# Altium PCB Flame68.pcbdoc (part 1 of 2)
Units mil, origin at the board's own origin, x right, y up, seen from the top; angles counter-clockwise.
Board outline 13330 x 5150 mil, 2 copper layers (Top Layer, Bottom Layer); 224 components, 167 nets, 1114 pads, 151 vias.
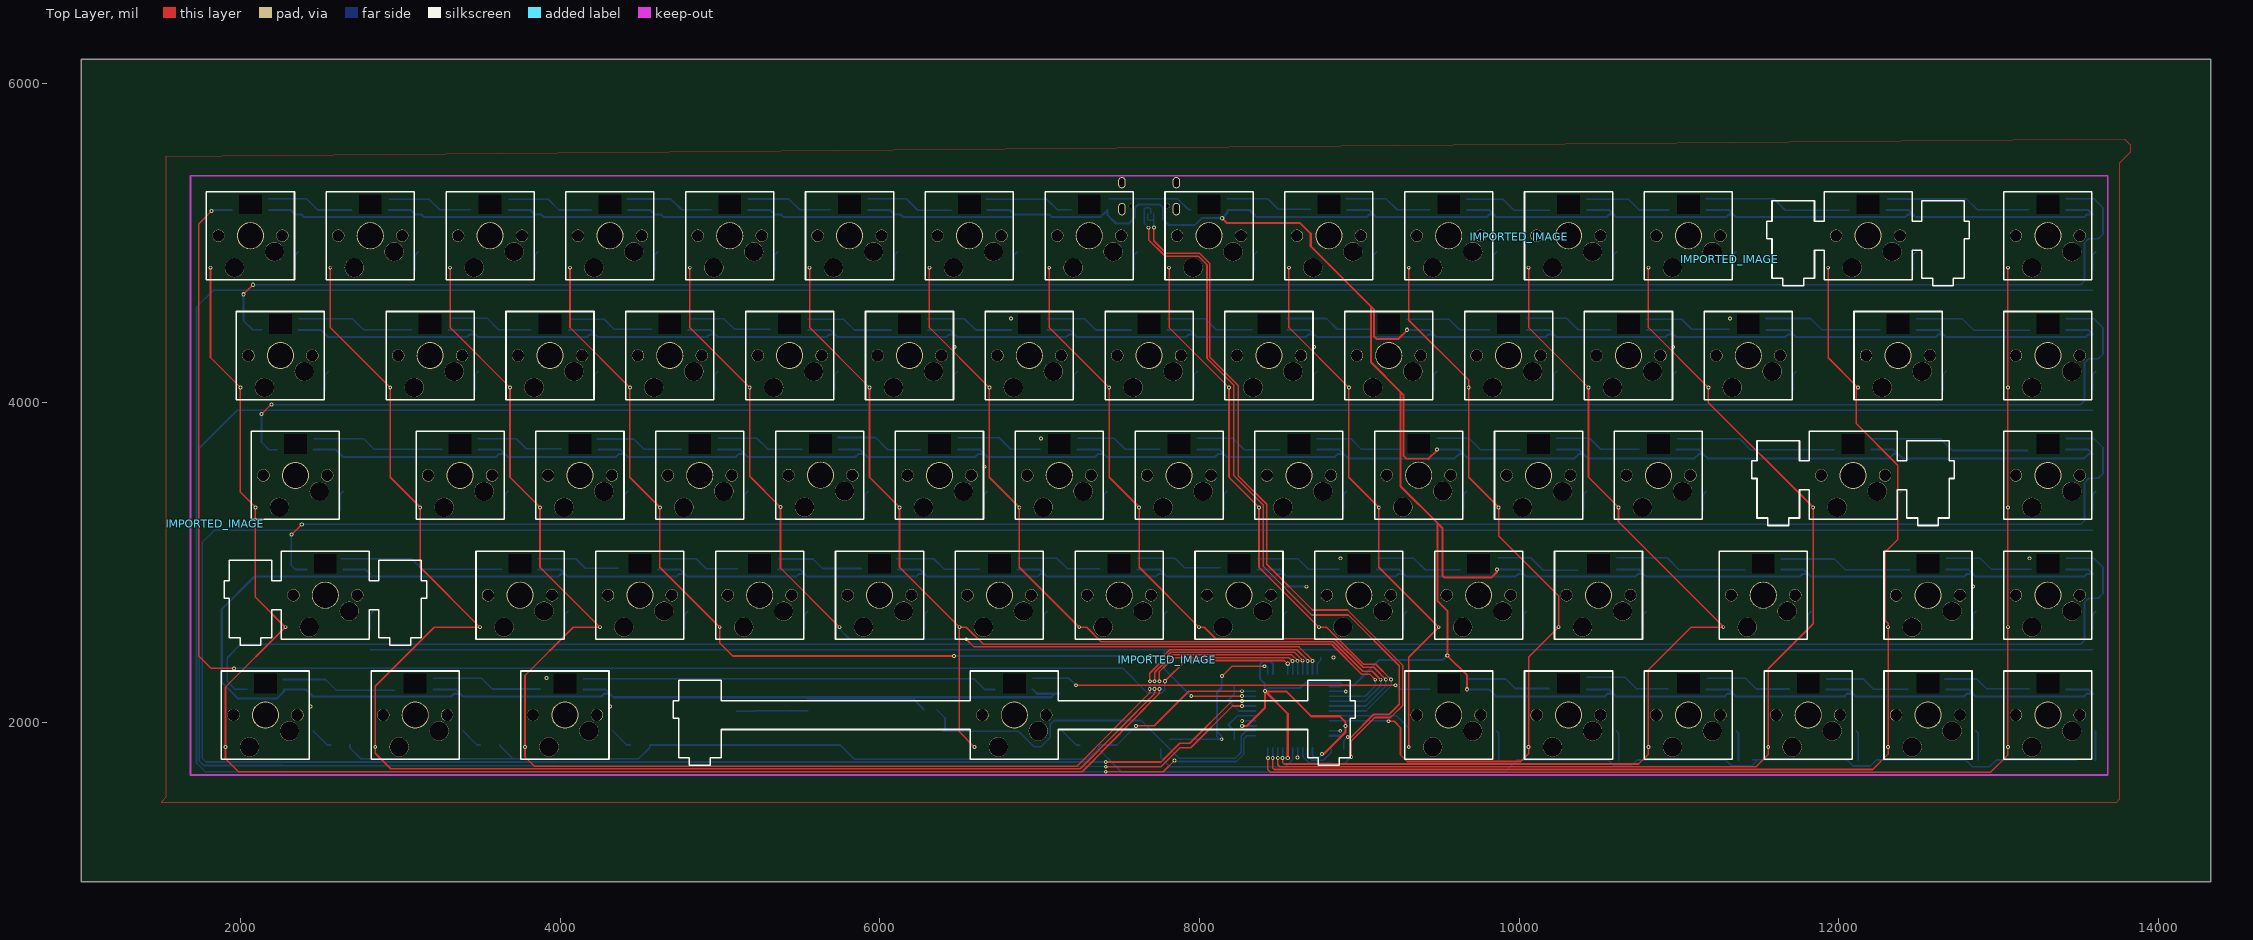
[diagram p0: Top Layer view]
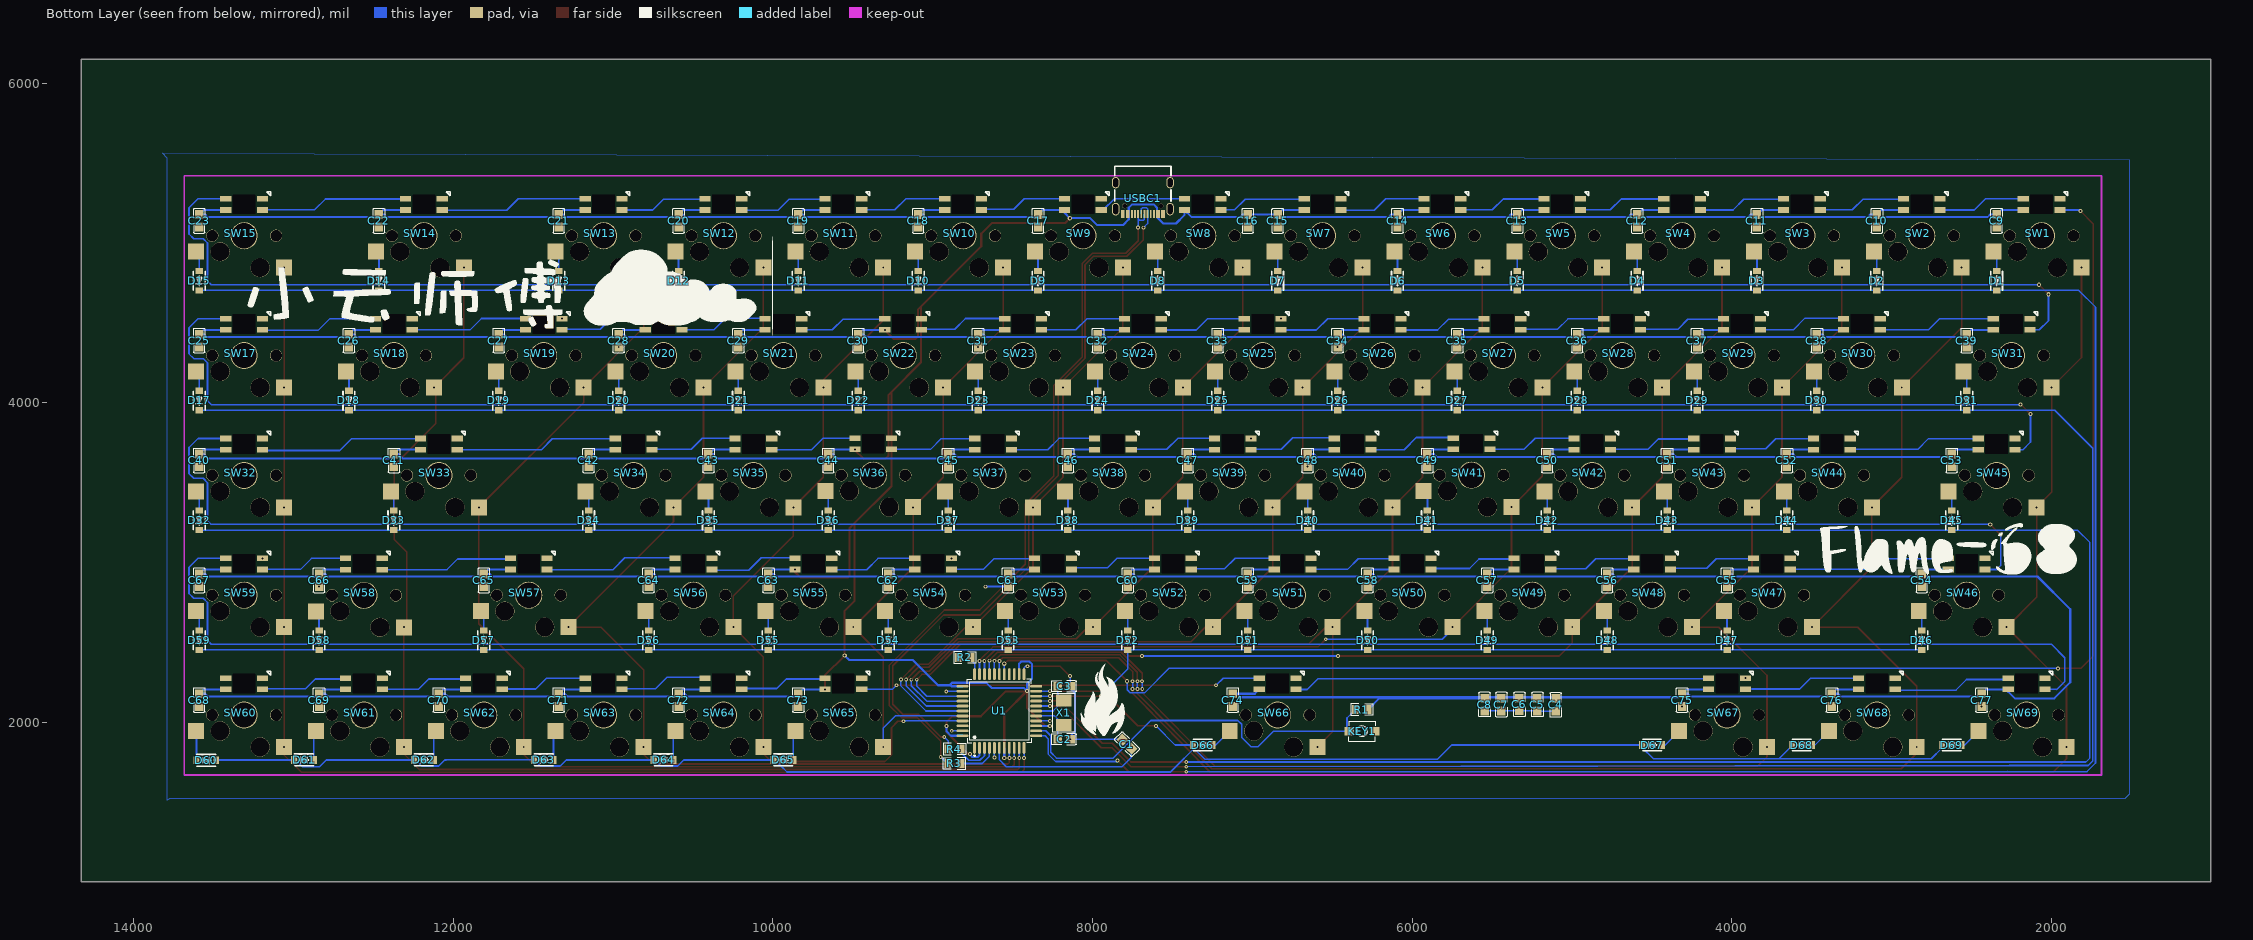
[diagram p1: Bottom Layer view, seen from below]

## Layer stack, top to bottom
Top Layer: signal copper (thickness not stored)
Dielectric: dielectric 12.6, FR-4, Dk 4.8
Bottom Layer: signal copper (thickness not stored)

## Board outline
14330,1000 1000,1000 1000,6150 14330,6150

## Components (designator, comment, footprint, x,y, rotation, side; value= is the part's Value field where it differs from the comment)
C1 "1uF" C0805 7784,1862 r45 bottom
C2 "20pF" C0805 8178,1893 r0 bottom
C3 "20pF" C0805 8178,2225 r0 bottom
C4 "100nF" C0805 5100.6,2108.2 r270 bottom
C5 "100nF" C0805 5215.2,2109.76 r270 bottom
C6 "100nF" C0805 5327.83,2110.83 r270 bottom
C7 "100nF" C0805 5440.19,2109.6 r270 bottom
C8 "470nF" C0805 5546,2110 r270 bottom
C9 "100nF" C0805 2340.77,5138.47 r90 bottom
C10 "100nF" C0805 3090.78,5138.47 r90 bottom
C11 "100nF" C0805 3840.8,5138.47 r90 bottom
C12 "100nF" C0805 4590.82,5138.47 r90 bottom
C13 "100nF" C0805 5340.83,5138.47 r90 bottom
C14 "100nF" C0805 6090.85,5138.47 r90 bottom
C15 "100nF" C0805 6840.86,5138.47 r90 bottom
C16 "100nF" C0805 7028.37,5138.47 r90 bottom
C17 "100nF" C0805 8340.9,5138.47 r90 bottom
C18 "100nF" C0805 9090.91,5138.47 r90 bottom
C19 "100nF" C0805 9840.93,5138.47 r90 bottom
C20 "100nF" C0805 10590.94,5138.47 r90 bottom
C21 "100nF" C0805 11340.96,5138.47 r90 bottom
C22 "100nF" C0805 12465.98,5138.47 r90 bottom
C23 "100nF" C0805 13591.01,5138.47 r90 bottom
C25 "100nF" C0805 13591.01,4388.46 r90 bottom
C26 "100nF" C0805 12653.49,4388.46 r90 bottom
C27 "100nF" C0805 11715.97,4388.46 r90 bottom
C28 "100nF" C0805 10965.95,4388.46 r90 bottom
C29 "100nF" C0805 10215.94,4388.46 r90 bottom
C30 "100nF" C0805 9465.92,4388.46 r90 bottom
C31 "100nF" C0805 8715.9,4388.46 r90 bottom
C32 "100nF" C0805 7965.89,4388.46 r90 bottom
C33 "100nF" C0805 7215.87,4388.46 r90 bottom
C34 "100nF" C0805 6465.86,4388.46 r90 bottom
C35 "100nF" C0805 5715.84,4388.46 r90 bottom
C36 "100nF" C0805 4965.82,4388.46 r90 bottom
C37 "100nF" C0805 4215.81,4388.46 r90 bottom
C38 "100nF" C0805 3465.79,4388.46 r90 bottom
C39 "100nF" C0805 2528.27,4388.46 r90 bottom
C40 "100nF" C0805 13591.01,3638.44 r90 bottom
C41 "100nF" C0805 12372.23,3638.44 r90 bottom
C42 "100nF" C0805 11153.46,3638.44 r90 bottom
C43 "100nF" C0805 10403.44,3638.44 r90 bottom
C44 "100nF" C0805 9653.42,3638.44 r90 bottom
C45 "100nF" C0805 8903.41,3638.44 r90 bottom
C46 "100nF" C0805 8153.39,3638.44 r90 bottom
C47 "100nF" C0805 7403.38,3638.44 r90 bottom
C48 "100nF" C0805 6653.36,3638.44 r90 bottom
C49 "100nF" C0805 5903.34,3638.44 r90 bottom
C50 "100nF" C0805 5153.33,3638.44 r90 bottom
C51 "100nF" C0805 4403.31,3638.44 r90 bottom
C52 "100nF" C0805 3653.3,3638.44 r90 bottom
C53 "100nF" C0805 2622.02,3638.44 r90 bottom
C54 "100nF" C0805 2809.53,2888.42 r90 bottom
C55 "100nF" C0805 4028.3,2888.42 r90 bottom
C56 "100nF" C0805 4778.32,2888.42 r90 bottom
C57 "100nF" C0805 5528.34,2888.42 r90 bottom
C58 "100nF" C0805 6278.35,2888.42 r90 bottom
C59 "100nF" C0805 7028.37,2888.42 r90 bottom
C60 "100nF" C0805 7778.38,2888.42 r90 bottom
C61 "100nF" C0805 8528.4,2888.42 r90 bottom
C62 "100nF" C0805 9278.42,2888.42 r90 bottom
C63 "100nF" C0805 10028.43,2888.42 r90 bottom
C64 "100nF" C0805 10778.45,2888.42 r90 bottom
C65 "100nF" C0805 11809.72,2888.42 r90 bottom
C66 "100nF" C0805 12840.99,2888.42 r90 bottom
C67 "100nF" C0805 13591.01,2888.42 r90 bottom
C68 "100nF" C0805 13591.01,2138.41 r90 bottom
C69 "100nF" C0805 12840.99,2138.41 r90 bottom
C70 "100nF" C0805 12090.98,2138.41 r90 bottom
C71 "100nF" C0805 11340.96,2138.41 r90 bottom
C72 "100nF" C0805 10590.94,2138.41 r90 bottom
C73 "100nF" C0805 9840.93,2138.41 r90 bottom
C74 "100nF" C0805 7122.12,2138.41 r90 bottom
C75 "100nF" C0805 4309.56,2138.41 r90 bottom
C76 "100nF" C0805 3372.04,2138.41 r90 bottom
C77 "100nF" C0805 2434.52,2138.41 r90 bottom
D1 "SOD4002-SH" SOD-123F_L2.8-W1.8-LS3.7-RD 2340.77,4763.46 r270 bottom
D2 "SOD4002-SH" SOD-123F_L2.8-W1.8-LS3.7-RD 3090.78,4763.46 r270 bottom
D3 "SOD4002-SH" SOD-123F_L2.8-W1.8-LS3.7-RD 3840.8,4763.46 r270 bottom
D4 "SOD4002-SH" SOD-123F_L2.8-W1.8-LS3.7-RD 4590.82,4763.46 r270 bottom
D5 "SOD4002-SH" SOD-123F_L2.8-W1.8-LS3.7-RD 5340.83,4763.46 r270 bottom
D6 "SOD4002-SH" SOD-123F_L2.8-W1.8-LS3.7-RD 6090.85,4763.46 r270 bottom
D7 "SOD4002-SH" SOD-123F_L2.8-W1.8-LS3.7-RD 6840.86,4763.46 r270 bottom
D8 "SOD4002-SH" SOD-123F_L2.8-W1.8-LS3.7-RD 7590.88,4763.46 r270 bottom
D9 "SOD4002-SH" SOD-123F_L2.8-W1.8-LS3.7-RD 8340.9,4763.46 r270 bottom
D10 "SOD4002-SH" SOD-123F_L2.8-W1.8-LS3.7-RD 9090.91,4763.46 r270 bottom
D11 "SOD4002-SH" SOD-123F_L2.8-W1.8-LS3.7-RD 9840.93,4763.46 r270 bottom
D12 "SOD4002-SH" SOD-123F_L2.8-W1.8-LS3.7-RD 10590.94,4763.46 r270 bottom
D13 "SOD4002-SH" SOD-123F_L2.8-W1.8-LS3.7-RD 11340.96,4763.46 r270 bottom
D14 "SOD4002-SH" SOD-123F_L2.8-W1.8-LS3.7-RD 12465.98,4763.46 r270 bottom
D15 "SOD4002-SH" SOD-123F_L2.8-W1.8-LS3.7-RD 13591.01,4763.46 r270 bottom
D17 "SOD4002-SH" SOD-123F_L2.8-W1.8-LS3.7-RD 13591.01,4013.45 r270 bottom
D18 "SOD4002-SH" SOD-123F_L2.8-W1.8-LS3.7-RD 12653.49,4013.45 r270 bottom
D19 "SOD4002-SH" SOD-123F_L2.8-W1.8-LS3.7-RD 11715.97,4013.45 r270 bottom
D20 "SOD4002-SH" SOD-123F_L2.8-W1.8-LS3.7-RD 10965.95,4013.45 r270 bottom
D21 "SOD4002-SH" SOD-123F_L2.8-W1.8-LS3.7-RD 10215.94,4013.45 r270 bottom
D22 "SOD4002-SH" SOD-123F_L2.8-W1.8-LS3.7-RD 9465.92,4013.45 r270 bottom
D23 "SOD4002-SH" SOD-123F_L2.8-W1.8-LS3.7-RD 8715.9,4013.45 r270 bottom
D24 "SOD4002-SH" SOD-123F_L2.8-W1.8-LS3.7-RD 7965.89,4013.45 r270 bottom
D25 "SOD4002-SH" SOD-123F_L2.8-W1.8-LS3.7-RD 7215.87,4013.45 r270 bottom
D26 "SOD4002-SH" SOD-123F_L2.8-W1.8-LS3.7-RD 6465.86,4013.45 r270 bottom
D27 "SOD4002-SH" SOD-123F_L2.8-W1.8-LS3.7-RD 5715.84,4013.45 r270 bottom
D28 "SOD4002-SH" SOD-123F_L2.8-W1.8-LS3.7-RD 4965.82,4013.45 r270 bottom
D29 "SOD4002-SH" SOD-123F_L2.8-W1.8-LS3.7-RD 4215.81,4013.45 r270 bottom
D30 "SOD4002-SH" SOD-123F_L2.8-W1.8-LS3.7-RD 3465.79,4013.45 r270 bottom
D31 "SOD4002-SH" SOD-123F_L2.8-W1.8-LS3.7-RD 2528.27,4013.45 r270 bottom
D32 "SOD4002-SH" SOD-123F_L2.8-W1.8-LS3.7-RD 13591.01,3263.43 r270 bottom
D33 "SOD4002-SH" SOD-123F_L2.8-W1.8-LS3.7-RD 12372.23,3263.43 r270 bottom
D34 "SOD4002-SH" SOD-123F_L2.8-W1.8-LS3.7-RD 11153.46,3263.43 r270 bottom
D35 "SOD4002-SH" SOD-123F_L2.8-W1.8-LS3.7-RD 10403.44,3263.43 r270 bottom
D36 "SOD4002-SH" SOD-123F_L2.8-W1.8-LS3.7-RD 9653.42,3263.43 r270 bottom
D37 "SOD4002-SH" SOD-123F_L2.8-W1.8-LS3.7-RD 8903.41,3263.43 r270 bottom
D38 "SOD4002-SH" SOD-123F_L2.8-W1.8-LS3.7-RD 8153.39,3263.43 r270 bottom
D39 "SOD4002-SH" SOD-123F_L2.8-W1.8-LS3.7-RD 7403.38,3263.43 r270 bottom
D40 "SOD4002-SH" SOD-123F_L2.8-W1.8-LS3.7-RD 6653.36,3263.43 r270 bottom
D41 "SOD4002-SH" SOD-123F_L2.8-W1.8-LS3.7-RD 5903.34,3263.43 r270 bottom
D42 "SOD4002-SH" SOD-123F_L2.8-W1.8-LS3.7-RD 5153.33,3263.43 r270 bottom
D43 "SOD4002-SH" SOD-123F_L2.8-W1.8-LS3.7-RD 4403.31,3263.43 r270 bottom
D44 "SOD4002-SH" SOD-123F_L2.8-W1.8-LS3.7-RD 3653.3,3263.43 r270 bottom
D45 "SOD4002-SH" SOD-123F_L2.8-W1.8-LS3.7-RD 2622.02,3263.43 r270 bottom
D46 "SOD4002-SH" SOD-123F_L2.8-W1.8-LS3.7-RD 2809.53,2513.42 r270 bottom
D47 "SOD4002-SH" SOD-123F_L2.8-W1.8-LS3.7-RD 4028.3,2513.42 r270 bottom
D48 "SOD4002-SH" SOD-123F_L2.8-W1.8-LS3.7-RD 4778.32,2513.42 r270 bottom
D49 "SOD4002-SH" SOD-123F_L2.8-W1.8-LS3.7-RD 5528.34,2513.42 r270 bottom
D50 "SOD4002-SH" SOD-123F_L2.8-W1.8-LS3.7-RD 6278.35,2513.42 r270 bottom
D51 "SOD4002-SH" SOD-123F_L2.8-W1.8-LS3.7-RD 7028.37,2513.42 r270 bottom
D52 "SOD4002-SH" SOD-123F_L2.8-W1.8-LS3.7-RD 7778.38,2513.42 r270 bottom
D53 "SOD4002-SH" SOD-123F_L2.8-W1.8-LS3.7-RD 8528.4,2513.42 r270 bottom
D54 "SOD4002-SH" SOD-123F_L2.8-W1.8-LS3.7-RD 9278.42,2513.42 r270 bottom
D55 "SOD4002-SH" SOD-123F_L2.8-W1.8-LS3.7-RD 10028.43,2513.42 r270 bottom
D56 "SOD4002-SH" SOD-123F_L2.8-W1.8-LS3.7-RD 10778.45,2513.42 r270 bottom
D57 "SOD4002-SH" SOD-123F_L2.8-W1.8-LS3.7-RD 11809.72,2513.42 r270 bottom
D58 "SOD4002-SH" SOD-123F_L2.8-W1.8-LS3.7-RD 12840.99,2513.42 r270 bottom
D59 "SOD4002-SH" SOD-123F_L2.8-W1.8-LS3.7-RD 13591.01,2513.42 r270 bottom
D60 "SOD4002-SH" SOD-123F_L2.8-W1.8-LS3.7-RD 13547,1761 r180 bottom
D61 "SOD4002-SH" SOD-123F_L2.8-W1.8-LS3.7-RD 12934.74,1763.4 r0 bottom
D62 "SOD4002-SH" SOD-123F_L2.8-W1.8-LS3.7-RD 12184.73,1763.4 r0 bottom
D63 "SOD4002-SH" SOD-123F_L2.8-W1.8-LS3.7-RD 11434.71,1763.4 r0 bottom
D64 "SOD4002-SH" SOD-123F_L2.8-W1.8-LS3.7-RD 10684.7,1763.4 r0 bottom
D65 "SOD4002-SH" SOD-123F_L2.8-W1.8-LS3.7-RD 9934.68,1763.4 r0 bottom
D66 "SOD4002-SH" SOD-123F_L2.8-W1.8-LS3.7-RD 7309.62,1857.15 r0 bottom
D67 "SOD4002-SH" SOD-123F_L2.8-W1.8-LS3.7-RD 4497.06,1857.15 r0 bottom
D68 "SOD4002-SH" SOD-123F_L2.8-W1.8-LS3.7-RD 3559.54,1857.15 r0 bottom
D69 "SOD4002-SH" SOD-123F_L2.8-W1.8-LS3.7-RD 2622.02,1857.15 r0 bottom
IMPORTED_IMAGE "IMPORTED_IMAGE" IMPORTED_IMAGE 11318.56,4898.86 r0 top
IMPORTED_IMAGE "IMPORTED_IMAGE" IMPORTED_IMAGE 1840.18,3243.21 r0 top
IMPORTED_IMAGE "IMPORTED_IMAGE" IMPORTED_IMAGE 7799.16,2391.98 r0 top
IMPORTED_IMAGE "IMPORTED_IMAGE" IMPORTED_IMAGE 10002.21,5038.76 r0 top
KEY1 "Switch3x4x2" SW-SMD_L4.0-W2.9-LS5.0 6313,1944 r180 bottom
R1 "10k" R0805 6315,2079 r180 bottom
R2 "10k" R0805 8799,2405 r180 bottom
R3 "22" R0805 8863.86,1741.49 r0 bottom
R4 "22" R0805 8864,1832 r180 bottom
SW1 "凯华轴座+3528反贴灯" 凯华轴座+3528反贴灯（无丝印）1 2059.51,5044.72 r0 top
SW2 "凯华轴座+3528反贴灯" 凯华轴座+3528反贴灯（无丝印）1 2809.53,5044.72 r0 top
SW3 "凯华轴座+3528反贴灯" 凯华轴座+3528反贴灯（无丝印）1 3559.54,5044.72 r0 top
SW4 "凯华轴座+3528反贴灯" 凯华轴座+3528反贴灯（无丝印）1 4309.56,5044.72 r0 top
SW5 "凯华轴座+3528反贴灯" 凯华轴座+3528反贴灯（无丝印）1 5059.58,5044.72 r0 top
SW6 "凯华轴座+3528反贴灯" 凯华轴座+3528反贴灯（无丝印）1 5809.59,5044.72 r0 top
SW7 "凯华轴座+3528反贴灯" 凯华轴座+3528反贴灯（无丝印）1 6559.61,5044.72 r0 top
SW8 "凯华轴座+3528反贴灯" 凯华轴座+3528反贴灯（无丝印）1 7309.62,5044.72 r0 top
SW9 "凯华轴座+3528反贴灯" 凯华轴座+3528反贴灯（无丝印）1 8059.64,5044.72 r0 top
SW10 "凯华轴座+3528反贴灯" 凯华轴座+3528反贴灯（无丝印）1 8809.66,5044.72 r0 top
SW11 "凯华轴座+3528反贴灯" 凯华轴座+3528反贴灯（无丝印）1 9559.67,5044.72 r0 top
SW12 "凯华轴座+3528反贴灯" 凯华轴座+3528反贴灯（无丝印）1 10309.69,5044.72 r0 top
SW13 "凯华轴座+3528反贴灯" 凯华轴座+3528反贴灯（无丝印）1 11059.7,5044.72 r0 top
SW14 "凯华轴座+3528反贴灯" 凯华轴座+3528反贴灯（无丝印）1 12184.73,5044.72 r0 top
SW15 "凯华轴座+3528反贴灯" 凯华轴座+3528反贴灯（无丝印）1 13309.75,5044.72 r0 top
SW17 "凯华轴座+3528反贴灯" 凯华轴座+3528反贴灯（无丝印）1 13309.75,4294.7 r0 top
SW18 "凯华轴座+3528反贴灯" 凯华轴座+3528反贴灯（无丝印）1 12372.23,4294.7 r0 top
SW19 "凯华轴座+3528反贴灯" 凯华轴座+3528反贴灯（无丝印）1 11434.71,4294.7 r0 top
SW20 "凯华轴座+3528反贴灯" 凯华轴座+3528反贴灯（无丝印）1 10684.7,4294.7 r0 top
SW21 "凯华轴座+3528反贴灯" 凯华轴座+3528反贴灯（无丝印）1 9934.68,4294.7 r0 top
SW22 "凯华轴座+3528反贴灯" 凯华轴座+3528反贴灯（无丝印）1 9184.66,4294.7 r0 top
SW23 "凯华轴座+3528反贴灯" 凯华轴座+3528反贴灯（无丝印）1 8434.65,4294.7 r0 top
SW24 "凯华轴座+3528反贴灯" 凯华轴座+3528反贴灯（无丝印）1 7684.63,4294.7 r0 top
SW25 "凯华轴座+3528反贴灯" 凯华轴座+3528反贴灯（无丝印）1 6934.62,4294.7 r0 top
SW26 "凯华轴座+3528反贴灯" 凯华轴座+3528反贴灯（无丝印）1 6184.6,4294.7 r0 top
SW27 "凯华轴座+3528反贴灯" 凯华轴座+3528反贴灯（无丝印）1 5434.58,4294.7 r0 top
SW28 "凯华轴座+3528反贴灯" 凯华轴座+3528反贴灯（无丝印）1 4684.57,4294.7 r0 top
SW29 "凯华轴座+3528反贴灯" 凯华轴座+3528反贴灯（无丝印）1 3934.55,4294.7 r0 top
SW30 "凯华轴座+3528反贴灯" 凯华轴座+3528反贴灯（无丝印）1 3184.54,4294.7 r0 top
SW31 "凯华轴座+3528反贴灯" 凯华轴座+3528反贴灯（无丝印）1 2247.02,4294.7 r0 top
SW32 "凯华轴座+3528反贴灯" 凯华轴座+3528反贴灯（无丝印）1 13309.75,3544.69 r0 top
SW33 "凯华轴座+3528反贴灯" 凯华轴座+3528反贴灯（无丝印）1 12090.98,3544.69 r0 top
SW34 "凯华轴座+3528反贴灯" 凯华轴座+3528反贴灯（无丝印）1 10872.2,3544.69 r0 top
SW35 "凯华轴座+3528反贴灯" 凯华轴座+3528反贴灯（无丝印）1 10122.18,3544.69 r0 top
SW36 "凯华轴座+3528反贴灯" 凯华轴座+3528反贴灯（无丝印）1 9372,3546 r0 top
SW37 "凯华轴座+3528反贴灯" 凯华轴座+3528反贴灯（无丝印）1 8622.15,3544.69 r0 top
SW38 "凯华轴座+3528反贴灯" 凯华轴座+3528反贴灯（无丝印）1 7872.14,3544.69 r0 top
SW39 "凯华轴座+3528反贴灯" 凯华轴座+3528反贴灯（无丝印）1 7122.12,3544.69 r0 top
SW40 "凯华轴座+3528反贴灯" 凯华轴座+3528反贴灯（无丝印）1 6372.1,3544.69 r0 top
SW41 "凯华轴座+3528反贴灯" 凯华轴座+3528反贴灯（无丝印）1 5627.42,3546.02 r0 top
SW42 "凯华轴座+3528反贴灯" 凯华轴座+3528反贴灯（无丝印）1 4872.07,3544.69 r0 top
SW43 "凯华轴座+3528反贴灯" 凯华轴座+3528反贴灯（无丝印）1 4122.06,3544.69 r0 top
SW44 "凯华轴座+3528反贴灯" 凯华轴座+3528反贴灯（无丝印）1 3372.04,3544.69 r0 top
SW45 "凯华轴座+3528反贴灯" 凯华轴座+3528反贴灯（无丝印）1 2340.77,3544.69 r0 top
SW46 "凯华轴座+3528反贴灯" 凯华轴座+3528反贴灯（无丝印）1 2528.27,2794.67 r0 top
SW47 "凯华轴座+3528反贴灯" 凯华轴座+3528反贴灯（无丝印）1 3747.05,2794.67 r0 top
SW48 "凯华轴座+3528反贴灯" 凯华轴座+3528反贴灯（无丝印）1 4497.06,2794.67 r0 top
SW49 "凯华轴座+3528反贴灯" 凯华轴座+3528反贴灯（无丝印）1 5247.08,2794.67 r0 top
SW50 "凯华轴座+3528反贴灯" 凯华轴座+3528反贴灯（无丝印）1 5997.1,2794.67 r0 top
SW51 "凯华轴座+3528反贴灯" 凯华轴座+3528反贴灯（无丝印）1 6747.11,2794.67 r0 top
SW52 "凯华轴座+3528反贴灯" 凯华轴座+3528反贴灯（无丝印）1 7497.13,2794.67 r0 top
SW53 "凯华轴座+3528反贴灯" 凯华轴座+3528反贴灯（无丝印）1 8247.14,2794.67 r0 top
SW54 "凯华轴座+3528反贴灯" 凯华轴座+3528反贴灯（无丝印）1 8997.16,2794.67 r0 top
SW55 "凯华轴座+3528反贴灯" 凯华轴座+3528反贴灯（无丝印）1 9747.18,2794.67 r0 top
SW56 "凯华轴座+3528反贴灯" 凯华轴座+3528反贴灯（无丝印）1 10497.19,2794.67 r0 top
SW57 "凯华轴座+3528反贴灯" 凯华轴座+3528反贴灯（无丝印）1 11528.46,2794.67 r0 top
SW58 "凯华轴座+3528反贴灯" 凯华轴座+3528反贴灯（无丝印）1 12560,2794 r0 top
SW59 "凯华轴座+3528反贴灯" 凯华轴座+3528反贴灯（无丝印）1 13309.75,2794.67 r0 top
SW60 "凯华轴座+3528反贴灯" 凯华轴座+3528反贴灯（无丝印）1 13309.75,2044.66 r0 top
SW61 "凯华轴座+3528反贴灯" 凯华轴座+3528反贴灯（无丝印）1 12559.74,2044.66 r0 top
SW62 "凯华轴座+3528反贴灯" 凯华轴座+3528反贴灯（无丝印）1 11809.72,2044.66 r0 top
SW63 "凯华轴座+3528反贴灯" 凯华轴座+3528反贴灯（无丝印）1 11059.7,2044.66 r0 top
SW64 "凯华轴座+3528反贴灯" 凯华轴座+3528反贴灯（无丝印）1 10309.69,2044.66 r0 top
SW65 "凯华轴座+3528反贴灯" 凯华轴座+3528反贴灯（无丝印）1 9559.67,2044.66 r0 top
SW66 "凯华轴座+3528反贴灯" 凯华轴座+3528反贴灯（无丝印）1 6840.86,2044.66 r0 top
SW67 "凯华轴座+3528反贴灯" 凯华轴座+3528反贴灯（无丝印）1 4028.3,2044.66 r0 top
SW68 "凯华轴座+3528反贴灯" 凯华轴座+3528反贴灯（无丝印）1 3090.78,2044.66 r0 top
SW69 "凯华轴座+3528反贴灯" 凯华轴座+3528反贴灯（无丝印）1 2153.26,2044.66 r0 top
U1 "ATMEGA32U4-AU" QFP-44_L10.0-W10.0-P0.80-LS13.2-BL 8583,2070 r0 bottom
USBC1 "TYPE-C-31-M-12" USB-C_SMD-TYPE-C-31-M-12 7684.63,5279.02 r180 bottom
X1 "16MHz" OSC-SMD_2P-L5.0-W3.2 8180,2060 r90 bottom

## Footprints (in the part's own frame and the unit in brackets; to place one, negate y for a bottom-side part, rotate by r counter-clockwise, add the part's x,y. Pads: shape width x height; smd on the part's side, far side on the other; paste and mask are expansions set on the pad)
C0805 [mm]
  rect 1.41x1.35 smd: 1(1,0) 2(-1,0)
  silkscreen extent -1.96,-0.9 1.96,0.9
IMPORTED_IMAGE [mil]
OSC-SMD_2P-L5.0-W3.2 [mm]
  rect 1.9x2.4 smd: 1(1.95,0) 2(-1.95,0)
  silkscreen extent -3.1,-1.75 3.1,1.75
QFP-44_L10.0-W10.0-P0.80-LS13.2-BL [mil]
  oval 17.36x74.62 smd: 1(155,230.37) 2(124,230.37) 3(93,230.37) 4(62,230.37) 5(31,230.37) 6(0,230.37) 7(-31,230.37) 8(-62,230.37) 9(-93,230.37) 10(-124,230.37) 11(-155,230.37) 23(-155,-230.37) 24(-124,-230.37) 25(-93,-230.37) 26(-62,-230.37) 27(-31,-230.37) 28(0,-230.37) 29(31,-230.37) 30(62,-230.37) 31(93,-230.37) 32(124,-230.37) 33(155,-230.37)
  oval 74.62x17.36 smd: 12(-230.37,155) 13(-230.37,124) 14(-230.37,93) 15(-230.37,62) 16(-230.37,31) 17(-230.37,0) 18(-230.37,-31) 19(-230.37,-62) 20(-230.37,-93) 21(-230.37,-124) 22(-230.37,-155) 34(230.37,-155) 35(230.37,-124) 36(230.37,-93) 37(230.37,-62) 38(230.37,-31) 39(230.37,0) 40(230.37,31) 41(230.37,62) 42(230.37,93) 43(230.37,124) 44(230.37,155)
  silkscreen extent -200,-200 200,283
R0805 [mil]
  rect 44.59x54.21 smd: 1(39.37,0) 2(-39.37,0)
  silkscreen extent -69,-36 69,36
SOD-123F_L2.8-W1.8-LS3.7-RD [mm]
  rect 1x1.2 smd: 1(1.55,0) 2(-1.55,0)
  silkscreen extent -1.49,-0.95 1.52,0.93
SW-SMD_L4.0-W2.9-LS5.0 [mm]
  rect 1.53x1.36 smd: 1(2.035,0) 2(-2.035,0)
  silkscreen extent -2.08,-1.58 2.08,1.58
USB-C_SMD-TYPE-C-31-M-12 [mm]
  oval 1.2x2 hole 0.8 slot 1.6 at 90 deg: 0(4.325,-1.716) 1(-4.325,-1.716)
  oval 1.2x1.8 hole 0.8 slot 1.4 at 90 deg: 2(-4.325,2.484) 3(4.325,2.484)
  rect 0.3x1.3 smd: A1(3.35,-2.484) A4(2.55,-2.484) A5(1.25,-2.484) A6(0.25,-2.484) A7(-0.25,-2.484) A8(-1.25,-2.484) A9(-2.55,-2.484) A12(-3.35,-2.484) B1(-3.05,-2.484) B4(-2.25,-2.484) B5(-1.75,-2.484) B6(-0.75,-2.484) B7(0.75,-2.484) B8(1.75,-2.484) B9(2.25,-2.484) B12(3.05,-2.484)
  round 0.75 hole 0.75 unplated: ""(-2.9,-1.216) ""(2.9,-1.216)
  silkscreen extent -4.47,-0.5 4.47,5.08
凯华轴座+3528反贴灯（无丝印）1 [mm]
  rect 1.778x0.889 smd far side: 1(2.921,4.091) 2(2.921,5.869) 5(-2.921,5.869) 6(-2.921,4.091)
  rect 2.54x2.54 smd far side: 3(-6.35,-5.08) 4(7.62,-2.54)
  round 1.95 hole 1.85: ""(-5.08,0) ""(5.08,0)
  round 3.05 hole 3: ""(-2.54,-5.08) ""(3.81,-2.54)
  round 4.3 hole 4: ""(0,0)
  Multi-Layer board cut-out: 1.777,6.532 -1.779,6.532 -1.779,3.476 1.777,3.476

## Via types
v1: diameter 24.02, hole 12, Top Layer to Bottom Layer, tented both sides, 129 vias
v2: diameter 26, hole 13, Top Layer to Bottom Layer, tented both sides, 21 vias
v3: diameter 26, hole 14, Top Layer to Bottom Layer, tented both sides, 1 vias

## Nets (pads, with @x,y where several pads share a name; then routed paths per layer and width w, separated by ;. In a path a pad name is that pad's centre, name@x,y a point inside that pad or via, vN(x,y) a via of type N, cw(c..) or ccw(c..) an arc to the next point about the centre after c; other vN are vias at no path point)
C0: SW1.3 SW31.3 SW45.3 SW46.3 SW69.3 U1.28 | length 10604.7
  Top Layer w10: v1(1809.51,4844.72) 1809.51,4282.21 v1(1997.02,4094.7) 1997.02,3438.44 v1(2090.77,3344.69) 2090.77,2782.17 v1(2278.27,2594.67) 1903.26,2219.66 v1(1903.26,1844.66) ; v1(1903.26,1844.66) 1903.3,1771.7 1985,1690 7266,1690 7745,2176 7749,2180 v1(7749,2207) ; v1(7749,2256) 7749,2317 7795,2363 7835,2403 8562,2403 v1(8582,2383)
  Bottom Layer w10: v1(7749,2207) v1(7749,2256) ; v1(8582,2383) 8583,2383 U1.28@8583,2300.37
C1: SW2.3 SW30.3 SW44.3 SW47.3 SW68.3 U1.29 | length 10153.7
  Top Layer w10: v1(2559.53,4844.72) 2559.53,4469.71 v1(2934.54,4094.7) 2934.54,3532.19 v1(3122.04,3344.69) 3122.04,2969.68 v1(3497.05,2594.67) ; v1(3497.05,2594.67) 3210.7,2594.7 2840.8,2224.8 v1(2840.78,1844.66) 2840.8,1805.2 2938,1708 7253,1708 7719,2180 v1(7719,2207) ; v1(7719,2256) 7719,2312 7828,2421 8575,2421 ; 8577,2421 v1@8616,2384
  Bottom Layer w10: v1(7719,2207) v1(7719,2256) ; U1.29@8614,2300.37 v1(8614,2384)
C1_2: C1.2 U1.6 | length 998.4
  Bottom Layer w10: C1.2@7756.16,1834.16 7756.2,1779.8 7815,1721 8540,1721 8583,1766 U1.6@8583,1839.63
C2: SW3.3 SW29.3 SW43.3 SW48.3 SW67.3 U1.30 | length 9107.4
  Top Layer w10: v1(3309.54,4844.72) 3309.54,4469.71 v1(3684.55,4094.7) 3684.55,3532.2 v1(3872.06,3344.69) 3872.06,2969.67 v1(4247.06,2594.67) ; v1(3778.3,1844.66) 3778.3,2292.3 4080.7,2594.7 v1(4247.06,2594.67) ; v1@3778.3,1845 3778.3,1782.7 3837,1724 7233,1724 7687,2183 7688,2184 v1(7688,2207) ; v1(7689,2256) 7689,2306 7820,2437 8284,2437 ; 8285,2437 8591,2437 8595,2437 8604,2428 v1@8646,2386
  Bottom Layer w10: v1(7688,2207) 7688,2256 v1(7689,2256) ; U1.30@8645,2300.37 v1(8645,2385)
C2_1: C2.1 U1.16 X1.2 | length 306
  Bottom Layer w10: C2.1@8217.37,1893 8217.37,1945.86 X1.2@8180,1983.23 8235.77,2039 U1.16@8357.18,2039
C3: SW4.3 SW28.3 SW42.3 SW49.3 U1.31 | length 6581.8
  Top Layer w10: v1(4059.56,4844.72) 4059.56,4469.71 v1(4434.57,4094.7) 4434.57,3532.19 v1(4622.07,3344.69) 4622.07,2969.68 v1(4997.08,2594.67) 4997.08,2495.92 5079,2414 v1(6464,2414) ; v1(7689,2414) 7774,2414 7814,2454 8609,2454 8677,2386 v1(8677,2383)
  Bottom Layer w10: v1(6464,2414) v1(7689,2414) ; U1.31@8676,2300.37 8676,2382 v1(8677,2383)
C3_1: C3.1 U1.17 X1.1 | length 306
  Bottom Layer w10: C3.1@8217.37,2226.99 8217.37,2174.14 X1.1@8180,2136.77 8246.77,2070 U1.17@8352.63,2070
C4: SW5.3 SW27.3 SW41.3 SW50.3 U1.32 | length 5778.7
  Top Layer w10: v1(4809.58,4844.72) 4809.58,4469.7 v1(5184.58,4094.7) 5184.58,3538.86 v1(5377.42,3346.02) 5377.42,2964.35 v1(5747.1,2594.67) ; v1(6540,2519) 6588,2471 8623,2471 8708,2386 v1(8708,2383)
  Bottom Layer w10: v1(5747.1,2594.67) 5747.1,2582.9 5811,2519 v1(6540,2519) ; U1.32@8707,2300.37 8707,2382 v1(8708,2383)
C5: SW6.3 SW26.3 SW40.3 SW51.3 SW66.3 U1.36 | length 6518.3
  Top Layer w10: v1(5559.59,4844.72) 5559.59,4469.71 v1(5934.6,4094.7) 5934.6,3532.19 v1(6122.1,3344.69) 6122.1,2969.68 v1(6497.11,2594.67) 6497.11,1940.89 v1(6590.86,1844.66) ; v1(6497.11,2594.67) 6540.3,2594.7 6648,2487 8827,2487 9015,2299 9067,2299 v1(9100,2266)
  Bottom Layer w10: U1.36@8813.37,2163 9037,2163 9100,2226 v1(9100,2266)
C6: SW7.3 SW25.3 SW39.3 SW52.3 U1.37 | length 5059.8
  Top Layer w10: v1(6309.61,4844.72) 6309.61,4469.71 v1(6684.62,4094.7) 6684.62,3532.19 v1(6872.12,3344.69) 6872.12,2969.68 v1(7247.13,2594.67) ; v1(7247.13,2594.67) 7293.3,2594.7 7384,2504 8820,2504 8837,2504 9022,2319 9081,2319 v1(9134,2266)
  Bottom Layer w10: U1.37@8813.37,2132 9038,2132 9134,2228 v1(9134,2266)
C7: SW8.3 SW24.3 SW38.3 SW53.3 U1.38 | length 4387.8
  Top Layer w10: v1(7059.62,4844.72) 7059.62,4469.71 v1(7434.63,4094.7) 7434.63,3532.2 v1(7622.14,3344.69) 7622.14,2969.67 v1(7997.14,2594.67) ; v1(7997.14,2594.67) 8029.3,2594.7 8101,2523 8844,2523 9024,2343 9090,2343 v1(9166,2267)
  Bottom Layer w10: U1.38@8813.37,2101 9040,2101 9166,2227 v1(9166,2267)
C8: SW9.3 SW23.3 SW37.3 SW54.3 U1.39 | length 3716.6
  Top Layer w10: v1(7809.64,4844.72) 7809.64,4469.71 v1(8184.65,4094.7) 8184.65,3532.19 v1(8372.15,3344.69) 8372.15,2969.68 v1(8747.16,2594.67) ; v1(8747.16,2594.67) 8795.3,2594.7 9027,2363 9103,2363 v1(9199,2267)
  Bottom Layer w10: U1.39@8813.37,2070 9042,2070 9199,2227 v1(9199,2267)
C9: SW10.3 SW22.3 SW36.3 SW55.3 SW65.3 U1.40 | length 4112.3
  Top Layer w10: v1(8559.66,4844.72) 8559.66,4469.7 v1(8934.66,4094.7) 8934.66,3532.2 v1(9122.17,3344.69) ; v1(9122.17,3344.69) 9122.2,2969.7 v1(9497.18,2594.67) ; v1(9309.67,1844.66) 9309.67,2407.16 v1(9497.18,2594.67)
  Bottom Layer w10: U1.40@8813.37,2039 9234,2039 9309.7,1963.3 v1(9309.67,1844.66)
C10: SW11.3 SW21.3 SW35.3 SW56.3 SW64.3 U1.41 | length 4979.9
  Top Layer w10: v1(9183,2006) 9218,2006 9258,1966 9258,1795 9299,1754 10011,1754 10059.7,1802.7 v1(10059.69,1844.66) ; v1(9309.67,4844.72) 9309.7,4516.3 9684.7,4141.3 v1(9684.68,4094.7) 9684.68,3532.19 v1(9872.18,3344.69) 9872.2,3165.8 10247.2,2790.8 v1(10247.19,2594.67) ; v1(10059.69,1844.66) 10059.69,2407.17 v1(10247.19,2594.67)
  Bottom Layer w10: U1.41@8813.37,2008 9181,2008 v1(9183,2006)
C11: SW12.3 SW20.3 SW34.3 SW57.3 SW63.3 U1.8 | length 6293.3
  Top Layer w10: 8520,1757 v1(8520,1776) 8520,1748 8530,1738 10748,1738 10809.7,1799.7 v1(10809.7,1844.66) 10809.7,2328.7 11075.7,2594.7 v1(11278.46,2594.67) ; v1(10059.69,4844.72) 10059.69,4469.71 v1(10434.7,4094.7) 10434.7,3532.19 v1(10622.2,3344.69) 10622.2,3254.8 11267,2610 11267,2606.13 v1(11278.46,2594.67)
  Bottom Layer w10: v1(8520,1776) 8521,1777 U1.8@8521,1839.63
C12: SW13.3 SW19.3 SW33.3 SW62.3 U1.9 | length 6804.1
  Top Layer w10: v1(8490,1776) 8490,1748 8490,1733 8502,1721 11483,1721 11559.7,1797.7 v1(11559.72,1844.66) 11559,2334 11841,2616 v1(11840.98,3344.69) 11184.71,4000.96 v1(11184.71,4094.7) 10809.7,4469.71 v1(10809.7,4844.72)
  Bottom Layer w10: v1(8490,1776) U1.9@8490,1839.63
C13: SW14.3 SW18.3 SW58.3 SW61.3 U1.10 | length 7277.5
  Top Layer w10: v1(8458,1775) 8458,1713 8467,1704 12213,1704 12309.7,1800.7 v1(12309.74,1844.66) ; v1(11934.73,4844.72) 11934.7,4280.3 12111,4104 12111,3869 12371,3609 12371,3144 12292,3065 12292,2635 12310,2617 v1@12310,2594 ; v1(12309.74,1844.66) v1@12309.74,2584
  Bottom Layer w10: v1(8458,1775) 8459,1776 U1.10@8459,1839.63
  other v1: 12309.74,2594.67 12122.23,4094.7
C14: SW15.3 SW17.3 SW32.3 SW59.3 SW60.3 U1.11 | length 7879.3
  Top Layer w10: v1(8428,1776) 8428,1748 8428,1740 8428,1702 8444,1686 12951,1686 13059.7,1794.7 v1@13059.7,1844.7 ; v1(13059.75,1844.66) v1(13059.75,3344.69) v1@13059.75,4103 ; v1(13059.75,4094.7) v1(13059.75,4844.72)
  Bottom Layer w10: v1(8428,1776) U1.11@8428,1839.63
  other v1: 13059.75,2594.67
D1_2: D1.2 SW1.4 | length 128
  Bottom Layer w10: D1.2@2340.77,4824.49 2340.77,4925.98 SW1.4@2359.51,4944.72
D2_2: D2.2 SW2.4 | length 128
  Bottom Layer w10: D2.2@3090.78,4824.49 3090.78,4925.97 SW2.4@3109.53,4944.72
D3_2: D3.2 SW3.4 | length 128
  Bottom Layer w10: D3.2@3840.8,4824.49 3840.8,4925.98 SW3.4@3859.54,4944.72
D4_2: D4.2 SW4.4 | length 128
  Bottom Layer w10: D4.2@4590.82,4824.49 4590.82,4925.98 SW4.4@4609.56,4944.72
D5_2: D5.2 SW5.4 | length 128
  Bottom Layer w10: D5.2@5340.83,4824.49 5340.83,4925.97 SW5.4@5359.58,4944.72
D6_2: D6.2 SW6.4 | length 128
  Bottom Layer w10: D6.2@6090.85,4824.49 6090.85,4925.98 SW6.4@6109.59,4944.72
D7_2: D7.2 SW7.4 | length 128
  Bottom Layer w10: D7.2@6840.86,4824.49 6840.86,4925.97 SW7.4@6859.61,4944.72
D8_2: D8.2 SW8.4 | length 128
  Bottom Layer w10: D8.2@7590.88,4824.49 7590.88,4925.98 SW8.4@7609.62,4944.72
D9_2: D9.2 SW9.4 | length 128
  Bottom Layer w10: D9.2@8340.9,4824.49 8340.9,4925.98 SW9.4@8359.64,4944.72
D10_2: D10.2 SW10.4 | length 128
  Bottom Layer w10: D10.2@9090.91,4824.49 9090.91,4925.97 SW10.4@9109.66,4944.72
D11_2: D11.2 SW11.4 | length 128
  Bottom Layer w10: D11.2@9840.93,4824.49 9840.93,4925.98 SW11.4@9859.67,4944.72
D12_2: D12.2 SW12.4 | length 128
  Bottom Layer w10: D12.2@10590.94,4824.49 10590.94,4925.97 SW12.4@10609.69,4944.72
D13_2: D13.2 SW13.4 | length 128
  Bottom Layer w10: D13.2@11340.96,4824.49 11340.96,4925.98 SW13.4@11359.7,4944.72
D14_2: D14.2 SW14.4 | length 128
  Bottom Layer w10: D14.2@12465.98,4824.49 12465.98,4925.97 SW14.4@12484.73,4944.72
D15_2: D15.2 SW15.4 | length 128
  Bottom Layer w10: D15.2@13591.01,4824.49 13591.01,4925.98 SW15.4@13609.75,4944.72
D17_2: D17.2 SW17.4 | length 128
  Bottom Layer w10: D17.2@13591.01,4074.47 13591.01,4175.96 SW17.4@13609.75,4194.7
D18_2: D18.2 SW18.4 | length 128
  Bottom Layer w10: D18.2@12653.49,4074.47 12653.49,4175.96 SW18.4@12672.23,4194.7
D19_2: D19.2 SW19.4 | length 128
  Bottom Layer w10: D19.2@11715.97,4074.47 11715.97,4175.96 SW19.4@11734.71,4194.7
D20_2: D20.2 SW20.4 | length 128
  Bottom Layer w10: D20.2@10965.95,4074.47 10965.95,4175.95 SW20.4@10984.7,4194.7
D21_2: D21.2 SW21.4 | length 128
  Bottom Layer w10: D21.2@10215.94,4074.47 10215.94,4175.96 SW21.4@10234.68,4194.7
D22_2: D22.2 SW22.4 | length 128
  Bottom Layer w10: D22.2@9465.92,4074.47 9465.92,4175.96 SW22.4@9484.66,4194.7
D23_2: D23.2 SW23.4 | length 128
  Bottom Layer w10: D23.2@8715.9,4074.47 8715.9,4175.95 SW23.4@8734.65,4194.7
D24_2: D24.2 SW24.4 | length 128
  Bottom Layer w10: D24.2@7965.89,4074.47 7965.89,4175.96 SW24.4@7984.63,4194.7
D25_2: D25.2 SW25.4 | length 128
  Bottom Layer w10: D25.2@7215.87,4074.47 7215.87,4175.95 SW25.4@7234.62,4194.7
D26_2: D26.2 SW26.4 | length 128
  Bottom Layer w10: D26.2@6465.86,4074.47 6465.86,4175.96 SW26.4@6484.6,4194.7
D27_2: D27.2 SW27.4 | length 128
  Bottom Layer w10: D27.2@5715.84,4074.47 5715.84,4175.96 SW27.4@5734.58,4194.7
D28_2: D28.2 SW28.4 | length 128
  Bottom Layer w10: D28.2@4965.82,4074.47 4965.82,4175.95 SW28.4@4984.57,4194.7
D29_2: D29.2 SW29.4 | length 128
  Bottom Layer w10: D29.2@4215.81,4074.47 4215.81,4175.96 SW29.4@4234.55,4194.7
D30_2: D30.2 SW30.4 | length 128
  Bottom Layer w10: D30.2@3465.79,4074.47 3465.79,4175.95 SW30.4@3484.54,4194.7
D31_2: D31.2 SW31.4 | length 128
  Bottom Layer w10: D31.2@2528.27,4074.47 2528.27,4175.95 SW31.4@2547.02,4194.7
D32_2: D32.2 SW32.4 | length 128
  Bottom Layer w10: D32.2@13591.01,3324.45 13591.01,3425.95 SW32.4@13609.75,3444.69
D33_2: D33.2 SW33.4 | length 128
  Bottom Layer w10: D33.2@12372.23,3324.45 12372.23,3425.94 SW33.4@12390.98,3444.69
D34_2: D34.2 SW34.4 | length 128
  Bottom Layer w10: D34.2@11153.46,3324.45 11153.46,3425.95 SW34.4@11172.2,3444.69
D35_2: D35.2 SW35.4 | length 128
  Bottom Layer w10: D35.2@10403.44,3324.45 10403.44,3425.95 SW35.4@10422.18,3444.69
D36_2: D36.2 SW36.4 | length 129.2
  Bottom Layer w10: D36.2@9653.42,3324.45 9653.42,3427.42 SW36.4@9672,3446
D37_2: D37.2 SW37.4 | length 128
  Bottom Layer w10: D37.2@8903.41,3324.45 8903.41,3425.95 SW37.4@8922.15,3444.69
D38_2: D38.2 SW38.4 | length 128
  Bottom Layer w10: D38.2@8153.39,3324.45 8153.39,3425.94 SW38.4@8172.14,3444.69
D39_2: D39.2 SW39.4 | length 128
  Bottom Layer w10: D39.2@7403.38,3324.45 7403.38,3425.95 SW39.4@7422.12,3444.69
D40_2: D40.2 SW40.4 | length 128
  Bottom Layer w10: D40.2@6653.36,3324.45 6653.36,3425.95 SW40.4@6672.1,3444.69
D41_2: D41.2 SW41.4 | length 131.5
  Bottom Layer w10: D41.2@5903.34,3324.45 5903.34,3421.94 SW41.4@5927.42,3446.02
D42_2: D42.2 SW42.4 | length 128
  Bottom Layer w10: D42.2@5153.33,3324.45 5153.33,3425.95 SW42.4@5172.07,3444.69
D43_2: D43.2 SW43.4 | length 128
  Bottom Layer w10: D43.2@4403.31,3324.45 4403.31,3425.94 SW43.4@4422.06,3444.69
D44_2: D44.2 SW44.4 | length 128
  Bottom Layer w10: D44.2@3653.3,3324.45 3653.3,3425.95 SW44.4@3672.04,3444.69
D45_2: D45.2 SW45.4 | length 128
  Bottom Layer w10: D45.2@2622.02,3324.45 2622.02,3425.94 SW45.4@2640.77,3444.69
D46_2: D46.2 SW46.4 | length 128
  Bottom Layer w10: D46.2@2809.53,2574.44 2809.53,2675.93 SW46.4@2828.27,2694.67
D47_2: D47.2 SW47.4 | length 128
  Bottom Layer w10: D47.2@4028.3,2574.44 4028.3,2675.92 SW47.4@4047.05,2694.67
D48_2: D48.2 SW48.4 | length 128
  Bottom Layer w10: D48.2@4778.32,2574.44 4778.32,2675.93 SW48.4@4797.06,2694.67
D49_2: D49.2 SW49.4 | length 128
  Bottom Layer w10: D49.2@5528.34,2574.44 5528.34,2675.93 SW49.4@5547.08,2694.67
D50_2: D50.2 SW50.4 | length 128
  Bottom Layer w10: D50.2@6278.35,2574.44 6278.35,2675.92 SW50.4@6297.1,2694.67
D51_2: D51.2 SW51.4 | length 128
  Bottom Layer w10: D51.2@7028.37,2574.44 7028.37,2675.93 SW51.4@7047.11,2694.67
D52_2: D52.2 SW52.4 | length 128
  Bottom Layer w10: D52.2@7778.38,2574.44 7778.38,2675.92 SW52.4@7797.13,2694.67
D53_2: D53.2 SW53.4 | length 128
  Bottom Layer w10: D53.2@8528.4,2574.44 8528.4,2675.93 SW53.4@8547.14,2694.67
D54_2: D54.2 SW54.4 | length 128
  Bottom Layer w10: D54.2@9278.42,2574.44 9278.42,2675.93 SW54.4@9297.16,2694.67
D55_2: D55.2 SW55.4 | length 128
  Bottom Layer w10: D55.2@10028.43,2574.44 10028.43,2675.92 SW55.4@10047.18,2694.67
D56_2: D56.2 SW56.4 | length 128
  Bottom Layer w10: D56.2@10778.45,2574.44 10778.45,2675.93 SW56.4@10797.19,2694.67
D57_2: D57.2 SW57.4 | length 128
  Bottom Layer w10: D57.2@11809.72,2574.44 11809.72,2675.93 SW57.4@11828.46,2694.67
D58_2: D58.2 SW58.4 | length 127.4
  Bottom Layer w10: D58.2@12840.99,2574.44 12840.99,2674.99 SW58.4@12860,2694
D59_2: D59.2 SW59.4 | length 128
  Bottom Layer w10: D59.2@13591.01,2574.44 13591.01,2675.93 SW59.4@13609.75,2694.67
D60_2: D60.2 SW60.4 | length 184.4
  Bottom Layer w10: D60.2@13608.02,1761 13608.02,1942.93 SW60.4@13609.75,1944.66
D61_2: D61.2 SW61.4 | length 187.1
  Bottom Layer w10: SW61.4@12859.74,1944.66 12873.72,1930.68 D61.2@12873.72,1763.4
D62_2: D62.2 SW62.4 | length 187.1
  Bottom Layer w10: SW62.4@12109.72,1944.66 12123.71,1930.67 D62.2@12123.7,1763.4
D63_2: D63.2 SW63.4 | length 187.1
  Bottom Layer w10: SW63.4@11359.7,1944.66 11373.69,1930.67 D63.2@11373.69,1763.4
D64_2: D64.2 SW64.4 | length 187.1
  Bottom Layer w10: SW64.4@10609.69,1944.66 10623.68,1930.67 D64.2@10623.67,1763.4
D65_2: D65.2 SW65.4 | length 187.1
  Bottom Layer w10: SW65.4@9859.67,1944.66 9873.66,1930.67 D65.2@9873.66,1763.4
D66_2: D66.2 SW66.4 | length 144
  Bottom Layer w10: SW66.4@7140.86,1944.66 7228.37,1857.15 D66.2@7248.6,1857.15
D67_2: D67.2 SW67.4 | length 144
  Bottom Layer w10: SW67.4@4328.3,1944.66 4415.81,1857.15 D67.2@4436.04,1857.15
D68_2: D68.2 SW68.4 | length 144
  Bottom Layer w10: SW68.4@3390.78,1944.66 3478.29,1857.15 D68.2@3498.52,1857.15
D69_2: D69.2 SW69.4 | length 144
  Bottom Layer w10: SW69.4@2453.26,1944.66 2540.77,1857.15 D69.2@2561,1857.15
D+: R3.2 U1.4 | length 251.3
  Bottom Layer w10: U1.4@8645,1839.63 8645,1788 8645,1787 8689.52,1741.48 R3.2@8824.49,1741.49
D-: R4.1 U1.3 | length 252.2
  Bottom Layer w10: U1.3@8676,1839.63 8676,1790 8705,1761 8751,1761 8775,1761 8824.6,1810.6 R4.1@8824.63,1832